# Altium PCB Wand Controllers.pcbdoc
Units mm, origin at the board's own origin, x right, y up, seen from the top; angles counter-clockwise.
Board outline 175.51 x 145.8 mm, 2 copper layers (Top Layer, Bottom Layer); 79 components, 82 nets, 340 pads, 98 vias.
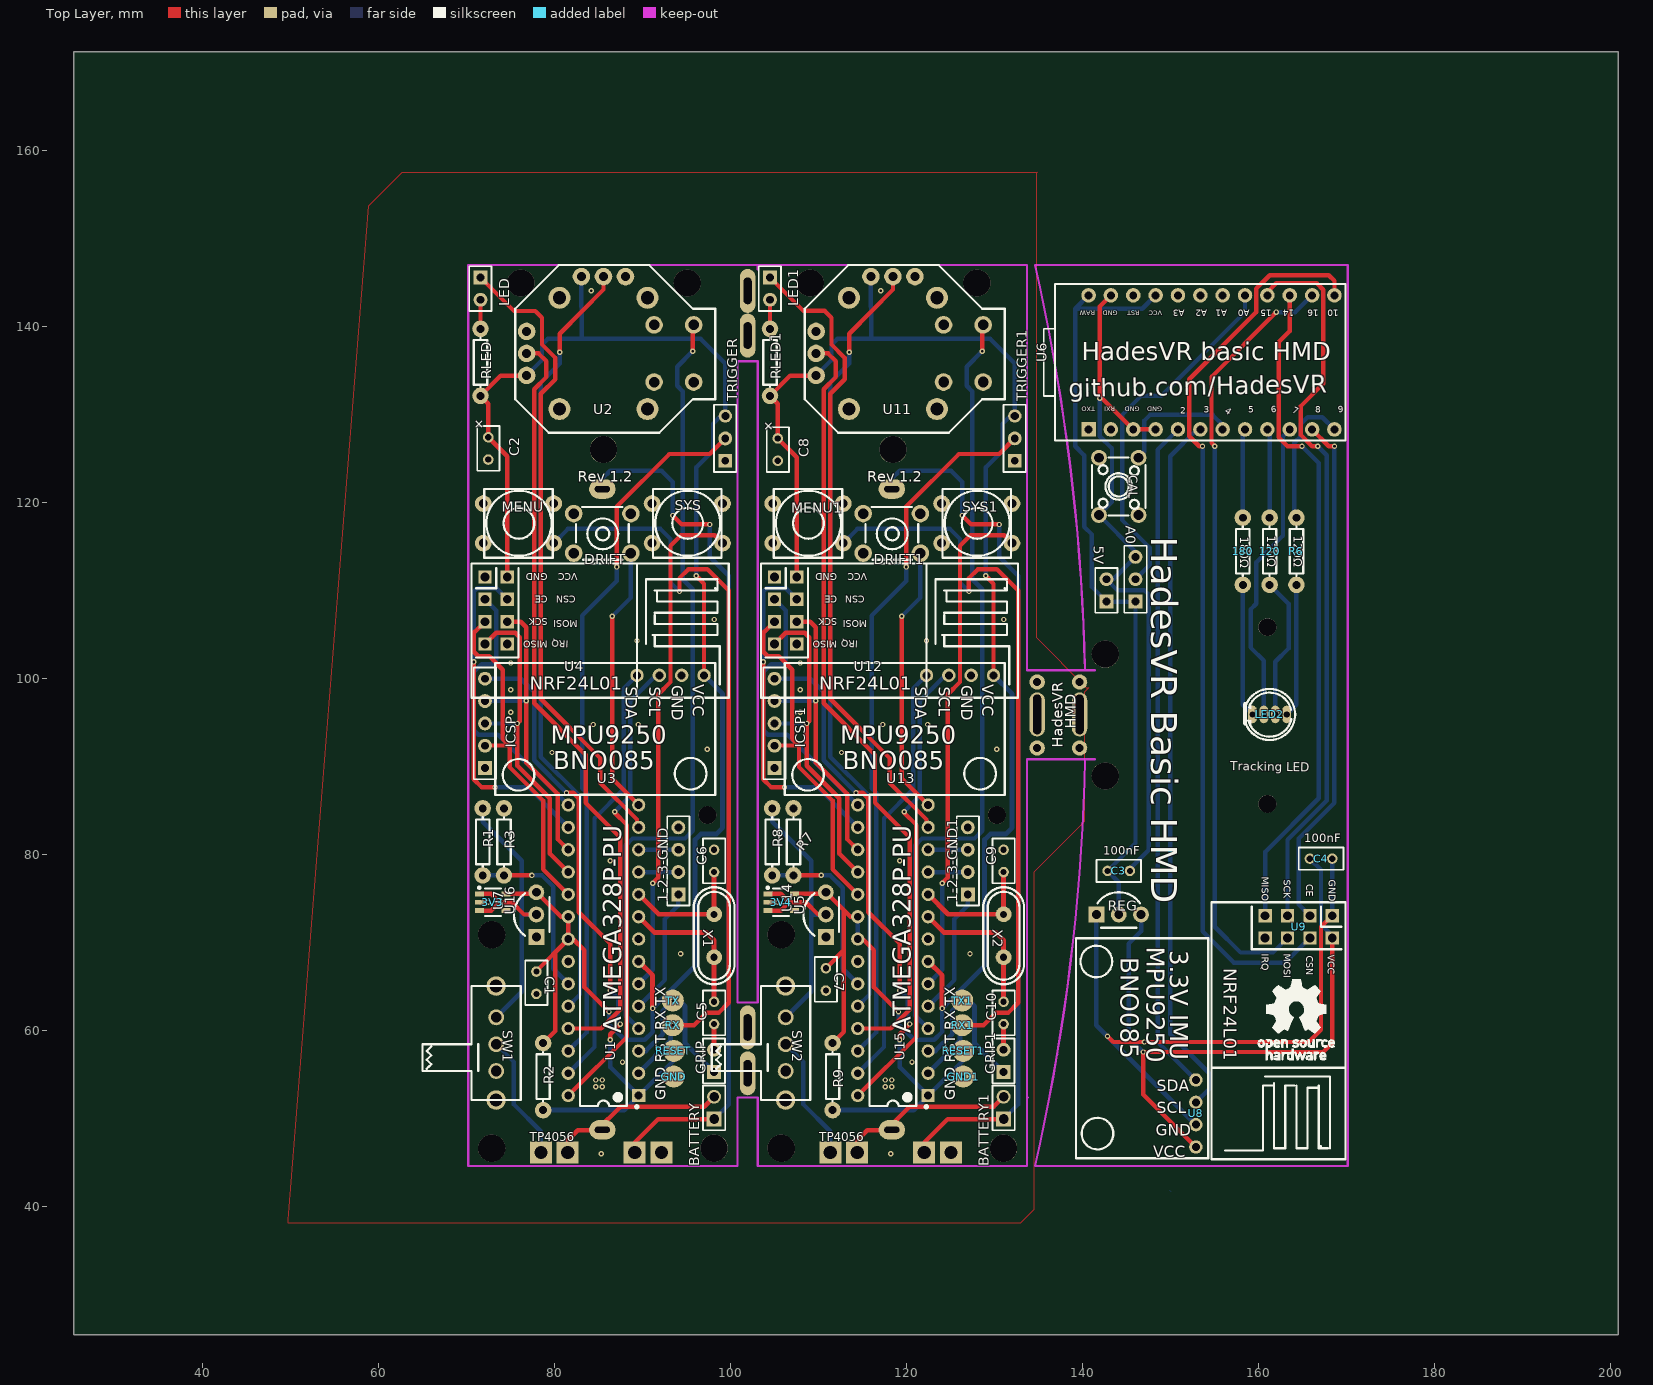
[diagram p0: Top Layer view]
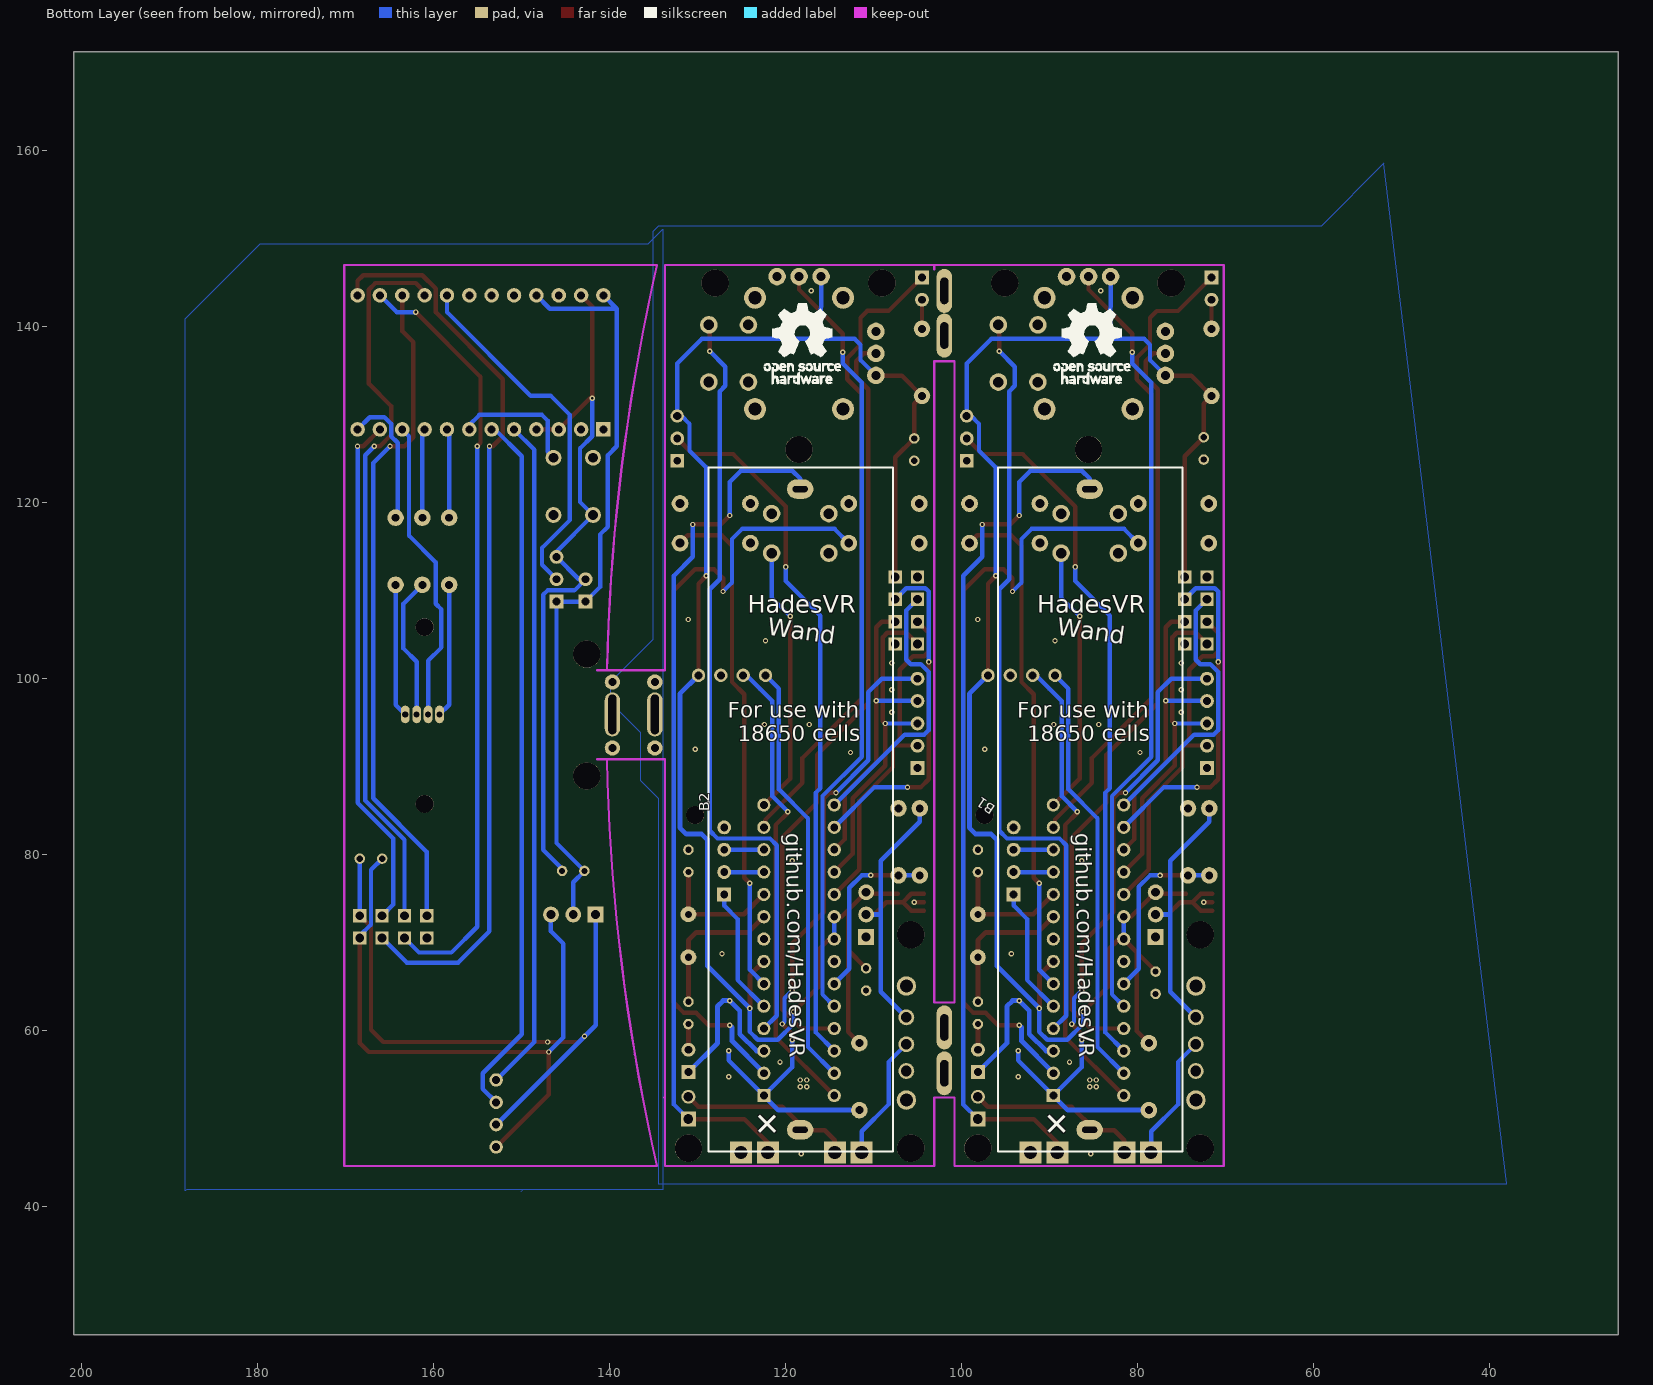
[diagram p1: Bottom Layer view, seen from below]

## Layer stack, top to bottom
Top Layer: signal copper (thickness not stored)
Dielectric: dielectric 0.32, FR-4, Dk 4.8
Bottom Layer: signal copper (thickness not stored)

## Board outline
200.914,25.4 25.4,25.4 25.4,171.196 200.914,171.196

## Components (designator, comment, footprint, x,y, rotation, side; value= is the part's Value field where it differs from the comment)
1-2-3-GND "HDR-M-2.54_1x4" HDR-M-2.54_1X4 94.107,79.248 r90 top
1-2-3-GND1 "HDR-M-2.54_1x4" HDR-M-2.54_1X4 126.999,79.249 r90 top
3V3 "LP5907MFX-3.0/NOPB" SOT-23-5_L3.0-W1.7-P0.95-LS2.8-BL 73.025,74.549 r270 top
3V4 "LP5907MFX-3.0/NOPB" SOT-23-5_L3.0-W1.7-P0.95-LS2.8-BL 105.791,74.549 r270 top
5V "HDR-F-2.54_1x2" HDR-F-2.54_1X2#1 142.748,109.982 r90 top
120 "1k" R_AXIAL-0.3 161.29,114.427 r90 top
180 "1k" R_AXIAL-0.3 158.242,114.427 r90 top
#LOGO1 "Graphic_Logo_Open_Hardware_Small" OPEN_HARDWARE 248.793,212.344 r0 bottom
#LOGO2 "Graphic_Logo_Open_Hardware_Small" OPEN_HARDWARE 281.685,212.345 r0 bottom
#LOGO3 "Graphic_Logo_Open_Hardware_Small" OPEN_HARDWARE 0.762,135.509 r0 top
A0 "HDR-M-2.54_1x3" HDR-M-2.54_1X3 146.05,111.252 r90 top
B1 "18650 Holder" BH-18650-A 85.471,85.09 r270 bottom
B2 "18650 Holder" BH-18650-A 118.363,85.091 r270 bottom
BATTERY "HDR-M-2.54_1x2" HDR-M-2.54_1X2 98.171,51.181 r270 top
BATTERY1 "HDR-M-2.54_1x2" HDR-M-2.54_1X2 131.063,51.182 r270 top
C1 "100nF" RAD-0.1 77.978,65.405 r90 top
C2 "100nF" RAD-0.1 72.517,126.111 r90 top
C3 "100nF" RAD-0.1 144.145,78.105 r180 top
C4 "100nF" RAD-0.1 167.131,79.503 r180 top
C5 "22pF" RAD-0.1 98.171,61.976 r90 top
C6 "22pF" RAD-0.1 98.171,79.248 r270 top
C7 "100nF" RAD-0.1 110.871,65.786 r90 top
C8 "100nF" RAD-0.1 105.41,125.984 r90 top
C9 "22pF" RAD-0.1 131.063,79.249 r270 top
C10 "22pF" RAD-0.1 131.063,61.977 r90 top
CAL "K4-6×6_TH" KEY-TH_4P-L6.0-W6.0-P4.50-LS6.5 144.145,121.793 r90 top
DRIFT "button6*6*8" KEY-TH_4P-L6.0-W6.0-P4.50-LS7.5 85.471,116.459 r180 top
DRIFT1 "button6*6*8" KEY-TH_4P-L6.0-W6.0-P4.50-LS7.5 118.363,116.46 r180 top
GND "RX" "TEST PAD FOOTPRINT" 93.599,54.737 r0 top
GND1 "RX" "TEST PAD FOOTPRINT" 126.491,54.738 r0 top
GRIP "HDR-F-2.54_1x2" HDR-F-2.54_1X2#1 98.171,56.515 r90 top
GRIP1 "HDR-F-2.54_1x2" HDR-F-2.54_1X2#1 131.063,56.516 r90 top
ICSP "HDR-M-2.54_1x5" HDR-M-2.54_1X5 72.136,94.869 r90 top
ICSP1 "HDR-M-2.54_1x5" HDR-M-2.54_1X5 105.028,94.87 r90 top
LED "HDR-F-2.54_1x2" HDR-F-2.54_1X2#2 71.628,144.272 r90 top
LED1 "HDR-F-2.54_1x2" HDR-F-2.54_1X2#2 104.52,144.273 r90 top
LED2 "φ5 RGB Transparent" LED-TH_4P-BD5.8-P1.30 161.29,95.885 r180 top
MENU "MenuBTN" SQUISHY_TACT_8*8*5 75.946,117.602 r180 top
MENU1 "MenuBTN" SQUISHY_TACT_8*8*5 108.838,117.603 r180 top
R1 "1k" R_AXIAL-0.3 71.882,81.407 r270 top
R2 "10k" R_AXIAL-0.3 78.74,54.737 r90 top
R3 "3.3k" R_AXIAL-0.3 74.295,81.407 r90 top
R6 "1k" R_AXIAL-0.3 164.338,114.427 r90 top
R7 "3.3k" R_AXIAL-0.3 107.187,81.408 r90 top
R8 "1k" R_AXIAL-0.3 104.774,81.408 r270 top
R9 "10k" R_AXIAL-0.3 111.632,54.738 r90 top
REG "TO-92-3_L4.9-W3.7-P2.54-L" TO-92-3_L4.9-W3.7-P2.54-L 144.145,73.152 r0 top
RESET "RX" "TEST PAD FOOTPRINT" 93.599,57.658 r0 top
RESET1 "RX" "TEST PAD FOOTPRINT" 126.491,57.659 r0 top
RLED "1k" R_AXIAL-0.3 71.628,135.89 r90 top
RLED1 "1k" R_AXIAL-0.3 104.52,135.891 r90 top
RX "RX" "TEST PAD FOOTPRINT" 93.472,60.579 r0 top
RX1 "RX" "TEST PAD FOOTPRINT" 126.364,60.58 r0 top
SW1 "Toggle SwitchesSK-12F14 G5" SW-TH_SK-12F14-G 73.406,58.547 r180 top
SW2 "Toggle SwitchesSK-12F14 G5" SW-TH_SK-12F14-G 106.298,58.548 r180 top
SYS "SysBTN" SQUISHY_TACT_8*8*5 95.123,117.602 r180 top
SYS1 "SysBTN" SQUISHY_TACT_8*8*5 128.015,117.603 r180 top
TRIGGER "HDR-F-2.54_1x3" HDR-F-2.54_1X3 99.441,127.254 r90 top
TRIGGER1 "HDR-F-2.54_1x3" HDR-F-2.54_1X3 132.333,127.255 r90 top
TX "TX" "TEST PAD FOOTPRINT" 93.472,63.373 r0 top
TX1 "TX" "TEST PAD FOOTPRINT" 126.364,63.374 r0 top
U1 "ATMEGA328P-PU" DIP-28_L34.6-W7.3-P2.54-LS10.2-BL 85.598,69.088 r90 top
U2 "PS4 joystick" "PS4 JOYSTICK" 85.598,136.906 r0 top
U3 "MPU9250" MPU9250 91.948,100.33 r270 top
U4 "NRF24L01" MOD-NRF24L01 72.136,111.506 r180 top
U5 "TO-92-3_L4.9-W3.7-P2.54-L" TO-92-3_L4.9-W3.7-P2.54-L 110.871,73.152 r90 top
U6 "Arduino Pro Micro" ARDUINO_PRO_MICRO 140.716,128.27 r90 top
U8 "MPU9250" MPU9250 152.908,51.816 r180 top
U9 "NRF24L01" ?#1 168.402,73.025 r90 top
U11 "PS4 joystick" "PS4 JOYSTICK" 118.49,136.907 r0 top
U12 "NRF24L01" MOD-NRF24L01 105.028,111.507 r180 top
U13 "MPU9250" MPU9250 124.84,100.331 r270 top
U15 "ATMEGA328P-PU" DIP-28_L34.6-W7.3-P2.54-LS10.2-BL 118.49,69.089 r90 top
U16 "TO-92-3_L4.9-W3.7-P2.54-L" TO-92-3_L4.9-W3.7-P2.54-L 77.978,73.152 r90 top
X1 "16MHZ" HC-49US_L11.0-W4.6-P4.88 98.171,70.739 r270 top
X2 "16MHZ" HC-49US_L11.0-W4.6-P4.88 131.063,70.74 r270 top
? "" ?#2 173.935,121.366 r0 top
? "" ?#2 175.33,95.759 r0 top
? "" ?#2 120.332,147.814 r0 top

## Footprints (in the part's own frame and the unit in brackets; to place one, negate y for a bottom-side part, rotate by r counter-clockwise, add the part's x,y. Pads: shape width x height; smd on the part's side, far side on the other; paste and mask are expansions set on the pad)
ARDUINO_PRO_MICRO [mil]
  rect 65x65 hole 35.43: 1(0,0)
  round 65 hole 35.43: 2(0,-100) 3(0,-200) 4(0,-300) 5(0,-400) 6(0,-500) 7(0,-600) 8(0,-700) 9(0,-800) 10(0,-900) 11(0,-1000) 12(0,-1100) 13(600,-1100) 14(600,-1000) 15(600,-900) 16(600,-800) 17(600,-700) 18(600,-600) 19(600,-500) 20(600,-400) 21(600,-300) 22(600,-200) 23(600,-100) 24(600,0)
  silkscreen extent -50,-1150 650,200
BH-18650-A [mm]
  oval 2.2x3 hole 0.7 slot 1.7 at 90 deg: 1(36.4,0) 2(-36.4,0)
  silkscreen extent -38.86,-10.41 38.86,10.54
DIP-28_L34.6-W7.3-P2.54-LS10.2-BL [mm]
  rect 1.5x1.5 hole 0.9: 1(-16.51,-4)
  round 1.5 hole 0.9: 2(-13.97,-4) 3(-11.43,-4) 4(-8.89,-4) 5(-6.35,-4) 6(-3.81,-4) 7(-1.27,-4) 8(1.27,-4) 9(3.81,-4) 10(6.35,-4) 11(8.89,-4) 12(11.43,-4) 13(13.97,-4) 14(16.51,-4) 15(16.51,4) 16(13.97,4) 17(11.43,4) 18(8.89,4) 19(6.35,4) 20(3.81,4) 21(1.27,4) 22(-1.27,4) 23(-3.81,4) 24(-6.35,4) 25(-8.89,4) 26(-11.43,4) 27(-13.97,4) 28(-16.51,4)
  silkscreen extent -17.94,-3.95 17.7,2.65
HC-49US_L11.0-W4.6-P4.88 [mm]
  round 1.8 hole 0.8: 1(-2.44,0) 2(2.44,0)
  silkscreen extent -5.51,-2.32 5.51,2.32
HDR-F-2.54_1X2#1 [mil]
  rect 62x62 hole 35: 1(-50,0)
  round 62 hole 35: 2(50,0)
  silkscreen extent -100,-49 100,50
HDR-F-2.54_1X2#2 [mil]
  round 62 hole 35: 1(-50,0)
  rect 62x62 hole 35: 2(50,0)
  silkscreen extent -100,-49 100,50
HDR-F-2.54_1X3 [mil]
  rect 62x62 hole 35: 1(-100,0)
  round 62 hole 35: 2(0,0)
  round 60 hole 36: 3(100,0)
  silkscreen extent -150,-49 150,50
HDR-M-2.54_1X2 [mm]
  round 1.575 hole 1.1: 1(-1.27,0)
  rect 1.7x1.7 hole 1.1: 2(1.27,0)
  silkscreen extent -2.54,-1.27 2.54,1.27
HDR-M-2.54_1X3 [mil]
  rect 62x62 hole 35: 1(-100,0)
  round 62 hole 35: 2(0,0) 3(100,0)
  silkscreen extent -150,-50 150,50
HDR-M-2.54_1X4 [mil]
  rect 62x62 hole 35: 1(-150,0)
  round 62 hole 35: 2(-50,0) 3(50,0) 4(150,0)
  silkscreen extent -200,-50 200,50
HDR-M-2.54_1X5 [mil]
  rect 62x62 hole 35: 1(-200,0)
  round 62 hole 35: 2(-100,0) 3(0,0) 4(100,0) 5(200,0)
  silkscreen extent -250,-50 250,50
KEY-TH_4P-L6.0-W6.0-P4.50-LS6.5 [mm]
  round 1.8 hole 1.1: 1(-3.251,-2.25) 2(3.251,-2.25) 3(3.251,2.25) 4(-3.251,2.25)
  silkscreen extent -3.3,-3.05 3.3,3.05
KEY-TH_4P-L6.0-W6.0-P4.50-LS7.5 [mm]
  round 2 hole 1.2: 1(-3.25,-2.25) 2(3.25,-2.25) 3(3.25,2.25) 4(-3.25,2.25)
  silkscreen extent -3,-3 3,3
LED-TH_4P-BD5.8-P1.30 [mm]
  oval 1x2 hole 0.7: 1(1.95,0) 2(0.65,0) 3(-0.65,0) 4(-1.95,0)
  silkscreen extent -2.9,-2.9 2.9,2.9
MOD-NRF24L01 [mm]
  rect 1.501x1.501 hole 1.001: 1(0,0) 2(-2.54,0) 3(0,2.54) 4(-2.54,2.54) 5(0,5.08) 6(-2.54,5.08) 7(0,7.62) 8(-2.54,7.62)
  silkscreen extent -27.69,-1.52 1.52,13.72
MPU9250 [mil]
  round 60 hole 36: 1(0,200) 2(0,100) 3(0,0) 4(0,-100)
  silkscreen extent -55,-734 536,250
OPEN_HARDWARE [mm]
  silkscreen extent -167.94,69.72 -159.2,78.92
"PS4 JOYSTICK" [mm]
  round 2 hole 1: 1(-8.73,-2.5) 2(-8.73,0) 3(-8.73,2.5) 4(-2.5,8.73) 5(0,8.73) 6(2.5,8.73)
  round 2 hole 1.2: 7(5.75,3.25) 8(10.25,3.25) 9(10.25,-3.25) 10(5.75,-3.25)
  round 2.5 hole 1.5: 11(-5,-6.325) 12(-5,6.325) 13(5,6.325) 14(5,-6.325)
  silkscreen extent -10.03,-9.02 12.7,10.03
R_AXIAL-0.3 [mil]
  round 74 hole 35.4: 1(-150,0) 2(150,0)
  silkscreen extent -110,-30 110,30
RAD-0.1 [mil]
  round 47 hole 28: 1(-50,0) 2(50,0)
  silkscreen extent -100,-50 100,50
SOT-23-5_L3.0-W1.7-P0.95-LS2.8-BL [mm]
  rect 0.55x1 smd: 1(-0.95,-1.5) 2(0,-1.5) 3(0.95,-1.5) 4(0.95,1.5) 5(-0.95,1.5)
  silkscreen extent -1.78,-1.65 1.55,0.9
SQUISHY_TACT_8*8*5 [mm]
  round 1.9 hole 1: 1(-4,2.25) 2(-4,-2.25) 3(4,2.25) 4(4,-2.25)
  silkscreen extent -3.9,-3.9 3.9,3.9
SW-TH_SK-12F14-G [mm]
  round 1.8 hole 1.2: 1(0,0.127) 2(0,-2.921) 3(0,3.175)
  round 2.2 hole 1.5: 4(0,-6.477) 5(0,6.477)
  silkscreen extent -2.79,-6.48 8.38,6.48
"TEST PAD FOOTPRINT" [mm]
  round 2.5 smd: 1(0,0)
TO-92-3_L4.9-W3.7-P2.54-L [mm]
  rect 1.8x1.8 hole 1: 1(-2.54,0)
  round 1.8 hole 1: 2(0,0) 3(2.54,0)
  silkscreen extent -2.41,-1.5 2.41,2.54
?#1 [mm]
  rect 1.501x1.501 hole 1.001: 1(0,0) 2(-2.54,0) 3(0,2.54) 4(-2.54,2.54) 5(0,5.08) 6(-2.54,5.08) 7(0,7.62) 8(-2.54,7.62)
  silkscreen extent -27.69,-1.52 1.52,13.72
?#2 [mm]

## Free pads (board coordinates)
  rect 2.5x2.5 hole 1.499: 3(92.203,46.1) 3(125.095,46.101) 4(89.154,46.101) 4(122.046,46.102) 5(81.534,46.101) 5(114.426,46.102) 6(78.486,46.101) 6(111.378,46.102)
  oval 1.75x5 hole 0.9 slot 3 at 90 deg: 9(101.981,55.118) 9(101.981,60.325) 9(101.981,138.938) 9(101.981,144.018)
  round 1.75 hole 0.9: 9(134.874,92.075) 9(134.874,99.568) 9(139.7,92.075) 9(139.7,99.568)
  oval 1.75x5 hole 0.9 slot 4.5 at 90 deg: 9(134.874,95.885) 9(139.7,95.885)
  round 3.1 hole 3.1 unplated: ""(72.898,46.609) ""(72.898,70.866) ""(76.2,144.907) ""(85.598,125.984) ""(95.123,144.907) ""(98.171,46.609) ""(105.79,46.61) ""(105.79,70.867) ""(109.092,144.908) ""(118.49,125.985) ""(128.015,144.908) ""(131.063,46.61) ""(142.621,88.9) ""(142.621,102.743)
  round 2.032 hole 2.032 unplated: ""(97.409,84.455) ""(130.301,84.456) ""(161.036,85.725) ""(161.036,105.791)

## Via types
v1: diameter 0.61, hole 0.305, Top Layer to Bottom Layer, 98 vias

## Nets (pads, with @x,y where several pads share a name; then routed paths per layer and width w, separated by ;. In a path a pad name is that pad's centre, name@x,y a point inside that pad or via, vN(x,y) a via of type N, cw(c..) or ccw(c..) an arc to the next point about the centre after c; other vN are vias at no path point)
3V3: 3V3.5 3V4.5 C1.2 C2.2 C7.2 C8.2 R2.2 R9.2 RLED1.1 RLED.1 TRIGGER1.3 TRIGGER.3 U1.7 U1.20 U1.21 U2.1 U2.4 U3.1 U4.2 U5.3 U11.1 U11.4 U12.2 U13.1 U15.7 U15.20 U15.21 U16.3 | length 396.5
  Top Layer w0.5: RLED.1 73.913,134.367 76.867,134.367 U2.1 ; RLED.1 72.517,131.191 C2.2 74.676,125.222 U4.2 ; 3V3.5 77.785,75.499 U16.3 80.772,72.898 U1.20 U1.21 ; C1.2 77.978,66.738 U1.21 ; R2.2 80.116,59.923 80.116,68.876 ; v1(86.233,62.103) 83.439,64.897 83.439,69.088 82.169,70.358 U1.21 ; v1(96.139,111.633) 97.028,110.744 U3.1 ; RLED1.1 105.41,131.191 C8.2 107.568,125.096 U12.2 ; RLED1.1@104.519,132.081 106.805,134.367 109.759,134.367 U11.1 ; 3V4.5 110.678,75.499 U5.3 113.664,72.899 U15.20 ; C7.2 112.901,69.085 ; R9.2 112.901,59.816 112.901,69.085 ; 112.901,73.662 112.901,69.085 ; U15.21 115.061,70.359 116.331,69.089 116.331,64.898 v1(119.125,62.104) ; v1(129.031,111.634) 129.92,110.745 U13.1
  Top Layer w0.55: U1.7 91.186,66.23 v1(91.186,62.484) ; U15.7 124.078,66.231 v1(124.078,62.485)
  Bottom Layer w0.5: U2.1@76.867,134.405 78.612,136.15 78.612,137.89 79.273,138.558 96.646,138.558 99.44,135.764 TRIGGER.3 98.92,129.79 98.043,128.9 98.043,125.856 96.139,123.952 v1(96.139,111.633) ; U1.21 U1.20 ; U2.4 83.116,138.558 ; v1(86.233,62.103) 86.233,60.706 88.011,58.928 90.297,58.928 91.186,59.817 v1(91.186,62.484) ; U11.1@109.759,134.405 111.504,136.15 111.504,137.89 112.165,138.558 129.538,138.558 132.332,135.764 132.332,129.795 131.812,129.791 130.935,128.901 130.935,125.857 129.031,123.953 v1(129.031,111.634) ; U15.21 U15.20 ; U11.4@115.99,145.637 116.008,138.558 ; v1(119.125,62.104) 119.125,60.707 120.903,58.929 123.189,58.929 124.078,59.818 v1(124.078,62.485)
  Bottom Layer w0.55: v1(91.186,62.484) 96.012,67.31 96.012,81.661 96.647,82.296 98.425,82.296 99.143,83.013 99.143,98.215 U3.1 ; v1(124.078,62.485) 128.904,67.311 128.904,81.662 129.539,82.297 131.317,82.297 132.035,83.014 132.035,98.216 U13.1
3V3HMD: C4.2 REG.3 U8.1 U9.2 | length 73.8
  Top Layer w0.5: v1(146.939,57.531) 146.939,52.705 U8.1 ; v1@147.193,57.531 167.386,57.531 168.402,58.547 U9.2
  Bottom Layer w0.5: REG.3 146.684,71.248 145.287,69.851 145.287,59.183 v1(146.939,57.531) ; C4.2 167.132,78.232 167.132,72.009 168.402,70.739 U9.2
A0: A0.2 U6.17 | length 41.4
  Bottom Layer w0.5: A0.2 147.701,112.903 147.701,114.808 144.526,117.983 144.526,129.921 146.685,132.08 148.971,132.08 158.496,141.605 U6.17
AXISX: U1.24 U2.5 U11.5 U15.24 | length 176.4
  Top Layer w0.5: v1(80.645,137.033) 80.644,139.144 85.607,144.174 U2.5 ; v1@113.536,137.034 113.536,139.145 118.5,144.174 U11.5@118.489,145.637
  Bottom Layer w0.5: v1(80.645,137.033) 80.644,135.764 78.485,133.605 78.485,91.06 82.93,86.615 82.93,64.072 U1.24 ; v1@113.536,137.034 113.536,135.764 111.377,133.605 111.377,91.06 115.822,86.615 115.822,64.073 U15.24@114.489,62.739
  other v1: 113.537,137.034
AXISY: U1.25 U2.2 U11.2 U15.25 | length 175.4
  Top Layer w0.5: U2.2 78.231,136.907 79.12,136.018 79.12,134.24 77.723,132.843 77.723,97.156 83.565,91.314 83.565,85.853 87.502,81.916 87.502,62.358 85.343,60.199 U1.25 ; U11.2@109.759,136.907 111.123,136.907 112.012,136.018 112.012,134.24 110.615,132.843 110.615,97.156 116.457,91.314 116.457,85.853 120.394,81.916 120.394,62.358 118.235,60.199 U15.25@114.489,60.199
B: R6.2 U6.12 | length 15.9
  Bottom Layer w0.5: R6.2 164.083,118.238 164.083,126.747 164.845,127.509 164.845,128.906 165.607,129.668 167.258,129.668 U6.12
CAL: CAL.2 U6.7 | length 14.7
  Bottom Layer w0.5: CAL.2 147.066,125.715 147.066,129.286 147.701,129.921 154.813,129.921 155.956,128.778 U6.7
CAL_1: CAL.1
CAL_3: CAL.3
CE: U1.15 U4.3 U12.3 U15.15 | length 62.7
  Bottom Layer w0.5: U4.3 73.406,107.696 73.406,102.108 72.898,101.6 71.755,101.6 70.866,100.711 70.866,94.107 71.374,93.599 73.597,93.599 U1.15 ; U12.3 106.298,107.697 106.298,102.109 105.79,101.601 104.647,101.601 103.758,100.712 103.758,94.108 104.266,93.6 106.489,93.6 U15.15
CEHMD: U6.11 U9.3 | length 58.9
  Top Layer w0.5: U6.11 168.021,126.365 v1(168.656,126.365)
  Bottom Layer w0.5: U9.3 164.591,74.296 164.591,81.789 168.655,85.853 v1(168.656,126.365)
CSN: U1.16 U4.4 U12.4 U15.16 | length 77.6
  Top Layer w0.5: v1(70.866,101.854) 70.866,88.519 71.754,87.631 v1(73.279,87.63) ; v1(103.758,101.855) 103.758,88.52 104.646,87.631 v1@106.17,87.631
  Bottom Layer w0.5: v1(70.866,101.854) 70.866,109.855 71.247,110.236 73.406,110.236 U4.4 ; v1(73.279,87.63) 77.026,87.63 U1.16 ; v1(103.758,101.855) 103.758,109.856 104.139,110.237 106.298,110.237 U12.4 ; v1(106.171,87.631) 109.918,87.631 U15.16
CSNHMD: U6.13 U9.4 | length 103.3
  Top Layer w0.5: v1(153.67,126.365) 153.289,126.365 152.146,127.508 152.146,133.985 159.766,141.605 159.766,144.272 161.29,145.796 168.021,145.796 168.656,145.161 U6.13
  Bottom Layer w0.5: v1(153.67,126.365) 153.67,71.247 157.226,67.691 163.068,67.691 U9.4
D1_1: 180.1 LED2.1 | length 15.2
  Bottom Layer w0.5: 180.1 158.242,96.983 LED2.1
D1_3: 120.1 LED2.3 | length 16.3
  Bottom Layer w0.5: 120.1 163.448,108.459 163.448,103.379 161.939,101.87 LED2.3
D1_4: LED2.4 R6.1 | length 15.2
  Bottom Layer w0.5: LED2.4 164.338,96.983 R6.1
DRIFT: DRIFT1.4 DRIFT.4 U1.14 U15.14 | length 61.4
  Top Layer w0.5: v1(86.614,107.061) 86.614,88.582 U1.14 ; v1(119.506,107.062) 119.506,88.583 U15.14
  Bottom Layer w0.5: v1(86.614,107.061) 88.721,109.168 DRIFT.4 ; v1(119.506,107.062) 121.613,109.168 DRIFT1.4@121.613,114.21
DRIFT_1: DRIFT1.1 DRIFT.1
DRIFT_3: DRIFT1.3 DRIFT.3
G: 120.2 U6.9 | length 10.1
  Bottom Layer w0.5: U6.9 161.29,128.016 120.2
GND: 1-2-3-GND1.4 1-2-3-GND.4 3V3.2 3V4.2 C1.1 C2.1 C5.1 C6.1 C7.1 C8.1 C9.1 C10.1 DRIFT1.2 DRIFT.2 GND1.1 GND.1 GRIP1.2 GRIP.2 ICSP1.1 ICSP.1 MENU1.2 MENU1.4 MENU.2 MENU.4 pad.3 pad.9@101.981,55.118 pad.9@101.981,60.325 pad.9@101.981,138.938 pad.9@101.981,144.018 pad.9@134.874,92.075 pad.9@134.874,95.885 pad.9@134.874,99.568 pad.9@139.7,99.568 R3.2 R7.2 SW1.4 SW1.5 SW2.4 SW2.5 SYS1.2 SYS1.4 SYS.2 SYS.4 TRIGGER1.1 TRIGGER.1 U1.8 U1.22 U2.3 U2.6 U2.7 U2.11 U2.12 U2.13 U2.14 U3.2 U4.1 U5.1 U11.3 U11.6 U11.7 U11.11 U11.12 U11.13 U11.14 U12.1 U13.2 U15.8 U15.22 U16.1 | length 8
  Top Layer w0.5: 3V3.2 v1(72.517,74.549) ; 3V4.2 v1(105.41,74.549)
  Top Layer w0.55: GRIP.2 C5.1 ; GRIP1.2 C10.1
  other v1: 85.344,45.974 118.236,45.975 84.709,53.594 85.471,53.594 117.601,53.595 118.363,53.595 84.709,54.356 85.471,54.356 117.601,54.357 118.363,54.357 93.599,54.737 126.491,54.738 87.757,56.388 120.649,56.389 94.361,68.707 127.253,68.708 86.36,79.248 119.252,79.249 79.756,91.567 112.648,91.568 97.409,91.948 130.301,91.949 84.455,94.742 89.535,94.742 117.347,94.743 122.427,94.743 75.057,96.139 107.949,96.14 75.057,98.679 107.949,98.68 75.057,101.727 107.949,101.728 89.408,104.267 122.3,104.268 98.171,106.68 131.063,106.681 84.201,144.018 117.093,144.019
GRIP: GRIP1.1 GRIP.1 TX1.1 TX.1 U1.3 U15.3 | length 36.6
  Bottom Layer w0.55: U1.3 90.424,57.658 92.329,59.563 92.329,62.23 v1(93.472,63.373) ; v1(93.472,63.373) 94.233,63.374 94.868,62.739 94.868,58.548 GRIP.1 ; U15.3 123.316,57.659 125.221,59.564 125.221,62.231 v1(126.364,63.374) ; v1@126.363,63.374 127.125,63.374 127.76,62.739 127.76,58.548 GRIP1.1@131.062,55.246
HMDGND: 5V.2 A0.3 C3.1 C4.1 CAL.4 pad.9@139.7,92.075 pad.9@139.7,95.885 REG.1 U6.3 U6.4 U6.23 U8.2 U9.1 | length 156.8
  Top Layer w0.5: v1(142.874,59.31) 143.509,58.675 165.734,58.675 167.131,60.072 167.131,71.756 U9.1 ; U6.23 141.986,142.24 v1(141.986,131.826) 142.24,131.826 U6.3 U6.4
  Bottom Layer w0.5: REG.1 141.604,60.58 U8.2 ; v1(141.986,131.826) 141.986,127.508 143.383,126.111 143.383,120.03 CAL.4 146.05,114.386 A0.3 143.51,111.252 5V.2 ; 5V.2 144.017,109.983 147.065,109.983 147.573,109.475 147.573,80.519 145.414,78.36 C3.1 ; U9.1 C4.1
  other v1: 147.065,58.675
JOYBTN: U1.4 U2.8 U11.8 U15.4 | length 178.7
  Top Layer w0.5: U2.8@95.721,140.791 95.757,140.754 v1(95.757,137.161) ; U11.8@128.613,140.791 128.649,140.755 v1@128.649,137.161
  Bottom Layer w0.5: U1.4 88.137,61.659 88.137,81.027 88.899,81.789 94.868,81.789 95.757,82.678 95.757,110.11 94.614,111.253 94.614,114.174 ; 94.614,118.873 94.614,115.063 94.615,114.173 ; 94.615,118.872 94.615,132.588 93.979,133.224 93.979,135.393 v1@95.757,137.171 ; U15.4 121.029,61.66 121.029,81.027 121.791,81.789 127.76,81.789 128.649,82.678 128.649,110.11 127.506,111.253 127.506,114.174 ; 127.507,114.174 127.506,115.063 127.506,118.873 ; 127.507,118.873 127.507,132.588 126.871,133.224 126.871,135.394 v1@128.649,137.172
  other v1: 128.649,137.162
LED: LED1.2 LED.2 U1.13 U15.13 | length 145.4
  Top Layer w0.5: LED.2 75.437,141.733 77.85,141.733 78.612,140.971 78.612,137.923 80.136,136.399 80.136,133.986 78.485,132.332 78.485,97.664 85.216,90.933 85.216,88.139 89.407,83.948 89.407,83.249 U1.13 ; LED1.2@104.519,145.543 108.329,141.733 110.742,141.733 111.504,140.971 111.504,137.923 113.028,136.399 113.028,133.986 111.377,132.333 111.377,97.664 118.108,90.933 118.108,88.139 122.299,83.948 122.299,83.25 U15.13
LEDB: 1-2-3-GND1.3 1-2-3-GND.3 U1.12 U15.12 | length 9.1
  Bottom Layer w0.5: U1.12 93.98,80.518 1-2-3-GND.3@94.107,80.391 ; U15.12 126.872,80.519 1-2-3-GND1.3@126.999,80.392
LEDG: 1-2-3-GND1.2 1-2-3-GND.2 U1.11 U15.11 | length 9
  Bottom Layer w0.5: U1.11 1-2-3-GND.2 ; U15.11 1-2-3-GND1.2
LEDHMD: LED2.2 U6.10 | length 34.9
  Bottom Layer w0.5: LED2.2 160.639,101.997 159.13,103.506 159.13,107.824 159.765,108.459 159.765,113.158 162.813,116.206 162.813,127.509 U6.10
LEDR: 1-2-3-GND1.1 1-2-3-GND.1 U1.5 U15.5 | length 29.1
  Bottom Layer w0.5: U1.5 92.583,65.723 92.583,72.644 94.107,74.168 1-2-3-GND.1 ; U15.5 125.475,65.724 125.475,72.645 126.999,74.169 1-2-3-GND1.1
MENU: MENU1.1 MENU.1 RX1.1 RX.1 U1.2 U15.2 | length 181.3
  Top Layer w0.5: v1(93.472,60.579) 95.885,60.579 97.282,61.976 98.679,61.976 99.822,63.119 99.822,109.982 97.409,112.395 95.25,112.395 94.234,111.379 v1(94.234,109.855) ; v1(126.364,60.58) 128.777,60.58 130.174,61.977 131.571,61.977 132.714,63.12 132.714,109.983 130.301,112.396 128.142,112.396 127.126,111.38 v1(127.126,109.856)
  Bottom Layer w0.5: MENU.1 81.561,116.967 92.075,116.967 93.218,115.824 93.218,110.871 v1(94.234,109.855) ; MENU1.1 114.453,116.968 124.967,116.968 126.11,115.825 126.11,110.872 v1(127.126,109.856)
  Bottom Layer w0.55: U1.2 89.598,55.181 93.218,58.801 93.218,60.325 v1(93.472,60.579) ; U15.2 122.49,55.182 126.11,58.802 126.11,60.326 v1(126.364,60.58)
MENU_2: MENU1.3 MENU.3
MISO: ICSP1.3 ICSP.3 U1.18 U4.7 U12.7 U15.18 | length 75.1
  Top Layer w0.5: U4.7 73.406,105.156 75.565,105.156 76.073,104.648 76.073,95.107 v1(75.819,94.853) 75.819,90.043 79.502,86.36 79.502,80.074 U1.18 ; U12.7 106.298,105.157 108.457,105.157 108.965,104.649 108.965,95.108 v1(108.711,94.854) 108.711,90.044 112.394,86.361 112.394,80.075 U15.18
  Bottom Layer w0.5: ICSP.3 v1(75.819,94.853) ; ICSP1.3@105.027,94.87 v1@108.71,94.855
MISOHMD: U6.15 U9.7 | length 76.4
  Top Layer w0.5: U6.15 163.576,139.446 162.306,138.176 162.306,127.381 163.322,126.365 v1(164.973,126.365)
  Bottom Layer w0.5: U9.7 160.781,80.265 166.877,86.361 166.877,124.461 v1(164.973,126.365)
MOSI: ICSP1.4 ICSP.4 U1.17 U4.6 U12.6 U15.17 | length 68.8
  Top Layer w0.5: U4.6 76.2,106.426 76.835,105.791 v1(76.835,97.459) ; v1(76.835,97.459) 76.834,90.425 80.39,86.869 80.39,81.725 U1.17 ; U12.6 109.092,106.427 109.727,105.792 v1(109.727,97.46) ; v1@109.726,97.461 109.726,90.425 113.282,86.869 113.282,81.726 U15.17@114.489,80.519
  Bottom Layer w0.5: ICSP.4 72.187,97.459 v1(76.835,97.459) ; ICSP1.4 105.079,97.46 v1(109.727,97.46)
MOSIHMD: U6.14 U9.6 | length 88.1
  Top Layer w0.5: v1(155.067,126.365) 154.685,126.747 154.685,134.24 v1(162.051,141.606)
  Bottom Layer w0.5: v1(155.067,126.365) 155.067,71.755 157.988,68.834 161.671,68.834 U9.6 ; v1(162.051,141.606) 164.212,141.606 U6.14
R: 180.2 U6.8 | length 10.1
  Bottom Layer w0.5: 180.2 158.242,128.016 U6.8
RESET: ICSP1.5 ICSP.5 R2.1 R9.1 RESET1.1 RESET.1 U1.1 U15.1 | length 153.3
  Top Layer w0.5: v1(81.407,86.995) 82.168,86.996 82.803,86.361 82.803,73.407 86.359,69.851 v1(86.359,64.517) ; v1(86.36,58.928) 86.36,59.563 v1(87.503,60.706) ; v1@114.298,86.996 115.06,86.996 115.695,86.361 115.695,73.407 119.251,69.851 v1@119.251,64.517 ; v1(119.252,58.929) 119.252,59.564 v1(120.395,60.707)
  Bottom Layer w0.5: ICSP.5 76.199,99.95 77.723,98.426 77.723,90.679 v1(81.407,86.995) ; v1(86.359,64.517) 87.248,63.628 87.248,60.961 v1(87.503,60.706) ; v1(86.36,58.928) 86.36,55.816 U1.1 93.599,56.579 v1(93.599,57.658) ; ICSP1.5@105.027,99.95 109.091,99.95 110.615,98.426 110.615,90.679 v1(114.299,86.996) ; v1(119.252,58.929) 119.252,55.817 U15.1 126.491,56.58 v1(126.491,57.659) ; v1@119.251,64.517 120.14,63.628 120.14,60.961 v1@120.394,60.707
  Bottom Layer w0.55: R2.1 87.947,50.927 U1.1 ; R9.1 120.839,50.928 U15.1
  other v1: 119.251,64.518
RLED_2: LED1.1 LED.1 RLED1.2 RLED.2 | length 6.6
  Top Layer w0.5: RLED.2 LED.1 ; RLED1.2 LED1.1
S$11: 
S$17: 
S$30: 
S$32: 
S$20761: 
S$20763: 
S$20769: 
S$20866: 
S$20868: 
S$22030: 
S$22038: 
S$22040: 
S$22043: 
S$22176: 
S$22178: 
S$58210: 
SCK: ICSP1.2 ICSP.2 U1.19 U4.5 U12.5 U15.19 | length 79
  Top Layer w0.5: U4.5 71.366,105.654 70.865,105.157 70.865,102.998 71.373,102.49 72.643,102.49 74.167,100.966 74.167,93.122 74.929,92.36 ; ICSP.2 72.167,92.36 74.93,92.36 74.93,89.916 78.74,86.106 78.74,78.296 U1.19 ; ICSP1.2 105.059,92.361 107.822,92.361 ; U12.5@105.027,106.427 104.258,105.655 103.757,105.157 103.757,102.998 104.265,102.49 105.535,102.49 107.059,100.966 107.059,93.123 107.821,92.361 ; U15.19 111.632,78.297 111.632,86.107 107.822,89.917 107.822,92.361
SCKHMD: U6.16 U9.5 | length 83.1
  Top Layer w0.5: U6.16 161.035,143.892 162.051,144.908 166.623,144.908 167.385,144.146 167.385,133.478 164.845,130.938 164.845,127.636 166.115,126.366 v1(166.751,126.365)
  Bottom Layer w0.5: U9.5 163.321,81.662 167.766,86.107 167.766,125.35 v1(166.751,126.365)
SCL: U1.28 U3.3 U13.3 U15.28 | length 106.8
  Top Layer w0.5: U1.28 88.265,59.245 88.265,83.312 86.868,84.709 v1(86.868,84.836) ; U15.28 121.157,59.246 121.157,83.313 119.76,84.709 v1(119.76,84.837)
  Bottom Layer w0.5: v1(86.868,84.836) 88.645,86.613 88.645,97.41 90.045,98.809 91.566,100.331 U3.3 ; v1(119.76,84.837) 121.537,86.614 121.537,97.41 122.937,98.81 124.458,100.331 U13.3@124.839,100.331
SDA: U1.27 U3.4 U13.4 U15.27 | length 96.9
  Bottom Layer w0.5: U1.27 84.581,58.103 84.581,84.075 87.883,87.377 87.883,98.805 U3.4 ; U15.27@114.489,55.119 117.473,58.104 117.473,84.075 120.775,87.377 120.775,98.806 U13.4
SW1_3: SW1.3 SW2.3
SYS: SYS1.1 SYS.1 U1.6 U15.6 | length 116.1
  Top Layer w0.5: v1(91.186,76.708) 91.82,77.342 91.82,98.169 93.217,99.569 93.217,115.063 94.398,116.241 98.234,116.241 SYS.1 ; v1(124.078,76.709) 124.712,77.343 124.712,98.17 126.109,99.569 126.109,115.063 127.291,116.242 131.126,116.242 SYS1.1
  Bottom Layer w0.5: U1.6 91.186,66.866 v1(91.186,76.708) ; U15.6 124.078,66.867 v1(124.078,76.709)
SYS_2: SYS1.3 SYS.3
TRIGG: TRIGGER1.2 TRIGGER.2 U1.26 U15.26 | length 160.2
  Top Layer w0.5: v1(87.122,112.649) 87.121,119.508 93.093,125.477 97.68,125.477 TRIGGER.2 ; v1@120.013,112.65 120.013,119.508 125.985,125.477 130.572,125.477 TRIGGER1.2@132.332,127.255
  Bottom Layer w0.5: U1.26@81.599,57.669 83.682,59.752 83.682,87.006 83.174,87.514 83.174,107.097 87.122,111.045 v1(87.122,112.649) ; U15.26@114.492,57.67 116.574,59.752 116.574,87.007 116.066,87.515 116.066,107.098 120.014,111.046 v1(120.014,112.65)
U1_9: C5.2 C10.2 U1.9 U15.9 X1.2 X2.2 | length 33.3
  Top Layer w0.55: U1.9 91.376,71.12 97.282,71.12 98.171,70.231 X1.2 C5.2 ; U15.9 124.268,71.121 130.174,71.121 131.063,70.232 X2.2 C10.2
U1_10: C6.2 C9.2 U1.10 U15.10 X1.1 X2.1 | length 28.6
  Top Layer w0.55: U1.10 91.857,73.179 X1.1 C6.2 ; U15.10 124.749,73.179 X2.1 C9.2
U1_23: R1.2 R3.1 R7.1 R8.2 U1.23 U15.23 | length 40.5
  Top Layer w0.5: R3.1 v1(77.47,77.597) ; R7.1 v1(110.362,77.598)
  Bottom Layer w0.5: R1.2 R3.1 ; v1(77.47,77.597) 78.612,77.598 79.882,76.328 79.882,66.993 U1.23 ; R8.2 R7.1 ; v1(110.362,77.598) 111.378,77.598 112.775,76.201 112.775,66.993 U15.23
U2_9: U2.9 U11.9
U2_10: U2.10 U11.10
U4_8: U4.8 U12.8
U5_4: B1.2 B2.2 BATTERY1.2 BATTERY.2 pad.4 | length 199.6
  Top Layer w0.5: pad.4@89.153,45.213 89.153,47.242 91.823,49.912 BATTERY.2 ; v1(93.472,118.491) 94.488,117.475 v1(97.663,117.475) ; pad.4@122.045,45.213 122.045,47.243 124.715,49.912 BATTERY1.2@131.062,49.912 ; v1@126.363,118.492 127.38,117.476 v1(130.555,117.476)
  Bottom Layer w0.5: B1.2@85.47,121.489 85.47,122.683 86.359,123.572 92.201,123.572 93.471,122.302 v1(93.472,118.491) ; v1(97.663,117.475) 97.663,113.792 99.821,111.634 99.821,51.563 BATTERY.2 ; B2.2@118.362,121.49 118.362,122.683 119.251,123.572 125.093,123.572 126.363,122.302 v1@126.363,118.492 ; v1(130.555,117.476) 130.555,113.793 132.713,111.634 132.713,51.563 BATTERY1.2@131.062,49.912
  other v1: 126.364,118.492
U5_5: B1.1 B2.1 BATTERY1.1 BATTERY.1 pad.5 | length 41.9
  Top Layer w0.5: pad.5@81.533,45.213 81.533,47.499 82.679,48.642 84.835,48.642 87.523,51.326 97.048,51.326 BATTERY.1 ; pad.5@114.425,45.213 114.425,47.499 115.571,48.642 117.727,48.642 120.415,51.327 129.94,51.327 BATTERY1.1@131.062,52.452
U5_6: pad.6 SW1.1 SW2.1 | length 30.7
  Bottom Layer w0.5: SW1.1@73.395,58.431 75.427,56.399 75.427,51.573 78.485,48.515 pad.6@78.485,45.213 ; SW2.1@106.287,58.432 108.319,56.4 108.319,51.574 111.377,48.515 pad.6@111.377,45.213
U6_1: U6.1
U6_2: U6.2
U6_18: U6.18
U6_19: U6.19
U6_20: U6.20
U6_22: U6.22
U8_3: U6.6 U8.3 | length 80.6
  Bottom Layer w0.5: U8.3 154.431,53.341 154.431,55.119 149.986,59.564 149.986,125.223 153.034,128.271 U6.6
U8_4: U6.5 U8.4 | length 76.6
  Bottom Layer w0.5: U6.5 148.589,125.985 148.589,58.675 U8.4
U9_8: U9.8
VBAT: 3V3.1 3V3.3 3V4.1 3V4.3 R1.1 R8.1 SW1.2 SW2.2 U5.2 U16.2 | length 77.3
  Top Layer w0.5: 3V3.3 72.837,73.599 73.787,74.549 ; 3V3.1 72.837,75.499 73.787,74.549 ; U16.2 76.581,73.152 75.184,74.549 73.787,74.549 ; 3V4.3 105.729,73.599 106.679,74.55 ; 3V4.1 105.729,75.5 106.679,74.55 ; U5.2 109.981,73.153 108.584,74.55 106.679,74.55
  Bottom Layer w0.5: R1.1 71.881,83.694 76.326,79.249 76.326,64.39 SW1.2 ; R8.1@104.773,85.218 104.773,83.694 109.218,79.249 109.218,64.39 SW2.2@106.297,61.469
  Bottom Layer w0.55: 76.326,73.152 U16.2 ; 109.218,73.153 U5.2
VCC: 5V.1 A0.1 C3.2 REG.2 U6.21 U6.24 | length 87.4
  Bottom Layer w0.5: U6.24 139.192,141.986 ; REG.2 144.145,76.835 C3.2 146.05,81.28 A0.1 5V.1 141.097,110.363 141.097,116.332 140.208,117.221 140.208,125.349 139.192,126.365 139.192,141.986 ; U6.21 146.812,141.986 139.192,141.986
pads on no net: 3V3.4 3V4.4

## Polygon pours and split planes (outlines as drawn)
GND on Bottom Layer (solid): 52.07,158.496 59.182,151.384 134.493,151.384 135.128,150.749 135.128,104.394 139.954,99.568 139.954,97.282 136.525,93.853 136.525,88.392 134.493,86.36 134.493,42.545 38.1,42.545
HMDGND on Bottom Layer (solid): 133.985,41.91 188.087,41.91 188.214,41.783 188.214,140.843 179.705,149.352 135.636,149.352 133.985,151.003
GND on Top Layer (solid): 58.928,153.67 62.738,157.48 134.874,157.48 134.747,157.353 134.747,104.648 140.462,98.933 140.716,98.933 140.208,98.425 140.208,83.693 134.493,77.978 134.493,39.624 132.969,38.1 49.784,38.1 49.784,38.481

## Keep-outs
Keep-Out Layer:
  lines w0.254 net S$20763: 134.629,146.94 cw(c-90.512,95.767) 140.313,100.964 ; 134.63,44.578 ccw(c-90.429,95.756) 140.323,90.788

## Other copper
Bottom Layer:
  region: 150.114,41.656 149.987,41.783 149.86,41.783

## Silkscreen, mask and mechanical layers (free items; w line width, h text height)
Top Overlay:
  lines w0.5 net S$58210: 158.496,94.869 158.496,97.028
  text "HadesVR basic HMD" at 139.954,136.144 h2.03
  text "github.com/HadesVR" at 138.448,131.953 h2.03 r1
  text "+" at 71.585,129.71 h1.2 r225
  text "+" at 104.478,129.456 h1.2 r225
  text "Rev 1.2" at 82.677,122.336 h1.2
  text "Rev 1.2" at 115.569,122.337 h1.2
  text "120Ω" at 160.655,116.205 h1.6 r270
  text "120Ω" at 163.703,116.205 h1.6 r270
  text "HadesVR Basic HMD" at 147.852,116.078 h3 r270
  text "180Ω" at 157.607,116.078 h1.6 r270
  text "HMD" at 139.284,94.234 h1.2 r90
  text "MPU9250" at 79.629,92.583 h2.03
  text "MPU9250" at 112.521,92.584 h2.03
  text "HadesVR" at 137.76,92.075 h1.2 r90
  text "BNO085" at 79.883,89.662 h2.03
  text "BNO085" at 112.775,89.663 h2.03
  text "Tracking LED" at 156.836,89.543 h1 r359
  text "100nF" at 165.227,81.026 h1.6
  text "100nF" at 142.367,79.629 h1.6
  text "U7" at 74.231,73.66 h1.14 r90
  text "U14" at 106.998,73.406 h1.14 r90
  text "MPU9250" at 147.32,69.469 h2.03 r270
  text "3.3V IMU" at 149.987,69.088 h2.03 r270
  text "BNO085" at 144.399,68.326 h2.03 r270
  text "ATMEGA328P-PU" at 87.63,59.69 h2.03 r90
  text "ATMEGA328P-PU" at 120.522,59.691 h2.03 r90
  text "GND RST RX TX" at 92.675,52.07 h1.2 r90
  text "GND RST RX TX" at 125.567,52.071 h1.2 r90
  text "TP4056" at 77.216,47.379 h1
  text "TP4056" at 110.108,47.38 h1
Bottom Overlay:
  text "HadesVR" at 91.44,107.458 h2
  text "HadesVR" at 124.332,107.459 h2
  text "Wand" at 89.293,104.928 h2 r8
  text "Wand" at 122.185,104.928 h2 r8
  text "For use with" at 93.726,95.493 h1.8
  text "For use with" at 126.618,95.494 h1.8
  text "18650 cells" at 92.583,92.826 h1.8
  text "18650 cells" at 125.475,92.827 h1.8
  text "github.com/HadesVR" at 87.133,82.407 h1.8 r89
  text "github.com/HadesVR" at 120.025,82.408 h1.8 r89
Top Solder:
  rectangle: 155.194,55.626 170.053,55.753

## Text inside footprints (layer, text, board x,y; h text height)
B1: Bottom Overlay "+" at 89.49,47.199 h3 r315
B2: Bottom Overlay "+" at 122.383,47.2 h3 r315
U3: Top Overlay "VCC" at 95.758,99.314 h1.27 r270; Top Overlay "GND" at 93.345,99.187 h1.27 r270; Top Overlay "SCL" at 90.805,99.06 h1.27 r270; Top Overlay "SDA" at 88.138,99.06 h1.27 r270
U4: Top Overlay "IRQ" at 81.682,104.285 h0.8 r177; Top Overlay "MOSI" at 82.677,106.572 h0.8 r180; Top Overlay "CSN" at 82.423,109.366 h0.8 r180; Top Overlay "VCC" at 82.677,111.906 h0.8 r180; Top Overlay "MISO" at 79.248,104.286 h0.8 r180; Top Overlay "SCK" at 79.248,106.826 h0.8 r180; Top Overlay "CE" at 79.248,109.366 h0.8 r180; Top Overlay "GND" at 79.248,111.906 h0.8 r180
U6: Top Overlay "9" at 169.07,130.176 h0.76 r5; Top Overlay "8" at 166.497,130.175 h0.76; Top Overlay "7" at 163.796,130.211 h0.76 r335; Top Overlay "6" at 161.45,130.176 h0.76 r5; Top Overlay "5" at 158.877,130.175 h0.76; Top Overlay "4" at 156.118,130.244 h0.76 r325; Top Overlay "3" at 153.797,130.175 h0.76; Top Overlay "2" at 151.13,130.071 h0.76; Top Overlay "GND" at 149.098,130.835 h0.56 r180; Top Overlay "GND" at 146.558,130.835 h0.56 r180; Top Overlay "RXI" at 143.764,130.835 h0.56 r180; Top Overlay "TXO" at 141.478,130.835 h0.56 r180; Top Overlay "RAW" at 141.478,141.757 h0.56 r180; Top Overlay "GND" at 144.018,141.757 h0.56 r180; Top Overlay "RST" at 146.558,141.757 h0.56 r180; Top Overlay "VCC" at 149.098,141.757 h0.56 r180; Top Overlay "A3" at 151.638,141.859 h0.76 r180; Top Overlay "A2" at 154.178,141.859 h0.76 r180; Top Overlay "A1" at 156.464,141.859 h0.76 r180; Top Overlay "A0" at 159.004,141.859 h0.76 r180; Top Overlay "15" at 161.544,141.859 h0.76 r180; Top Overlay "14" at 164.084,141.859 h0.76 r180; Top Overlay "16" at 166.878,141.859 h0.76 r180; Top Overlay "10" at 169.164,141.859 h0.76 r180
U8: Top Overlay "VCC" at 148.082,45.593 h1.27; Top Overlay "GND" at 148.336,48.006 h1.27; Top Overlay "SCL" at 148.463,50.546 h1.27; Top Overlay "SDA" at 148.463,53.086 h1.27
U9: Top Overlay "IRQ" at 160.382,68.707 h0.8 r270; Top Overlay "MOSI" at 162.922,68.707 h0.8 r270; Top Overlay "CSN" at 165.462,68.453 h0.8 r270; Top Overlay "VCC" at 167.875,68.58 h0.8 r270; Top Overlay "MISO" at 160.382,77.47 h0.8 r270; Top Overlay "SCK" at 162.922,77.089 h0.8 r270; Top Overlay "CE" at 165.462,76.581 h0.8 r270; Top Overlay "GND" at 168.002,77.089 h0.8 r270
U12: Top Overlay "IRQ" at 114.574,104.286 h0.8 r177; Top Overlay "MOSI" at 115.569,106.573 h0.8 r180; Top Overlay "CSN" at 115.315,109.367 h0.8 r180; Top Overlay "VCC" at 115.569,111.907 h0.8 r180; Top Overlay "MISO" at 112.14,104.287 h0.8 r180; Top Overlay "SCK" at 112.14,106.827 h0.8 r180; Top Overlay "CE" at 112.14,109.367 h0.8 r180; Top Overlay "GND" at 112.14,111.907 h0.8 r180
U13: Top Overlay "VCC" at 128.65,99.315 h1.27 r270; Top Overlay "GND" at 126.237,99.188 h1.27 r270; Top Overlay "SCL" at 123.697,99.061 h1.27 r270; Top Overlay "SDA" at 121.03,99.061 h1.27 r270